# Altium PCB power-v3.2-exp.PcbDoc (part 2 of 2)
Units mil, origin at the board's own origin, x right, y up, seen from the top; angles counter-clockwise.
Board outline 6141.73 x 2047.24 mil, 4 copper layers (Top Layer, Layer 1, Layer 2, Bottom Layer), stack 60.469 mil thick; 175 components, 101 nets, 496 pads, 48 vias.
Unrouted connection lines stored in the file: 349.
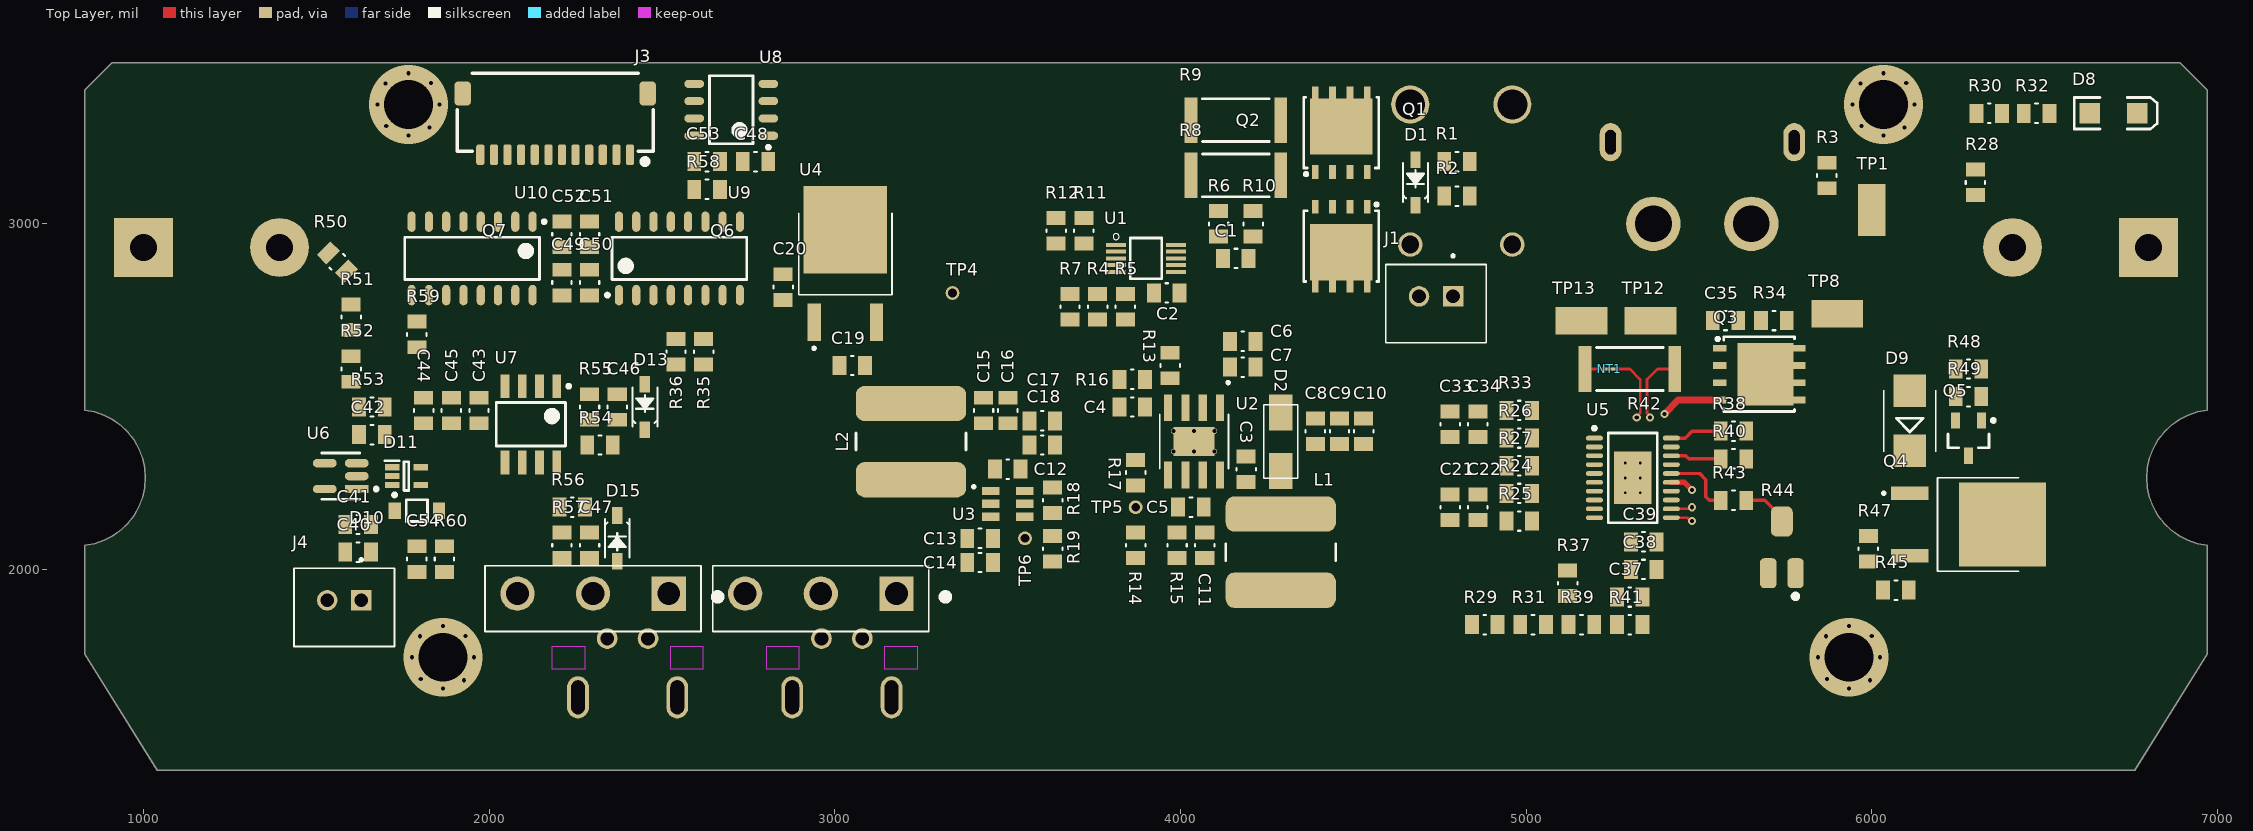
[diagram p0: Top Layer view]

## Free pads (board coordinates)
  round 78.74 hole 78.74: 1(5934.27,1745.85) 1(6034.27,3345.85)
  round 220.47 hole 141.73: ""(1765.73,3345.85) ""(1865.73,1745.85) ""(5934.27,1745.85) ""(6034.27,3345.85)

## Via types
v1: diameter 23.62, hole 11.81, Top Layer to Bottom Layer, 38 vias
v2: diameter 19.68, hole 7.87, Top Layer to Bottom Layer, 6 vias
v3: diameter 228.35, hole 141.73, Top Layer to Bottom Layer, 4 vias

## Nets (pads, with @x,y where several pads share a name; then routed paths per layer and width w, separated by ;. In a path a pad name is that pad's centre, name@x,y a point inside that pad or via, vN(x,y) a via of type N, cw(c..) or ccw(c..) an arc to the next point about the centre after c; other vN are vias at no path point)
3V3: C2.2 C20.1 C40.2 C41.1 C48.1 C49.1 C50.1 R4.1 R5.1 R7.1 R20.1 R35.2 R36.2 R59.2 U1.6 U4.2 U6.5 U8.1 U9.1 U10.16
5V: C15.1 C16.1 C17.1 C18.1 C19.1 J2.4 J2.8 L2.2 R18.1 R21.1 U4.3
5V_VFB: R18.2 R19.2 TP6.1 U3.4
12V: C8.1 C9.1 C10.1 C13.1 C14.1 C21.2 C22.2 C38.1 C39.1 C43.2 C44.1 C45.1 L1.2 R14.2 R22.1 R24.2 R25.2 U3.3 U3.5 U5.13 U5.14 U7.6
12V_EN: R13.2 R16.1 U2.3
12V_VSENSE: R14.1 R17.2 TP5.1 U2.5
+HV: C28.POS C29.POS C30.POS C31.POS C36.1 D7.2 D12.C D14.C P2.1 P3.1 R28.2 R29.2 R45.2 R46.2 R50.2
+VBAT: F1.3 F1.4 P1.2
A0_SEL: R12.1 U1.2
A1_SEL: R11.1 U1.1
CH_GND: R3.2
CHARGE: R37.2 TP9.1 U5.8 U10.14
CHARGE_OB: J3.10 U10.3
CHIP: U7.2 U10.13
CHIP_GATE: R54.2 R55.1 U7.7
CHIP_OB: J3.11 U10.4
DONE: R35.1 TP10.1 U5.7 U9.5
DONE_OB: J3.3 U9.12
FAULT: R36.1 TP11.1 U5.6 U9.4
FAULT_OB: J3.4 U9.13
FB: C37.1 R39.1 R41.2 U5.10
GND: C2.1 C4.1 C5.1 C6.2 C7.2 C8.2 C9.2 C10.2 C11.1 C13.2 C14.2 C15.2 C16.2 C17.2 C18.2 C19.2 C20.2 C21.1 C22.1 C23.1 C24.1 C25.1 C26.1 C27.1 C28.NEG C29.NEG C30.NEG C31.NEG C32.NEG C33.1 C34.1 C36.2 C37.2 C38.2 C39.2 C40.1 C41.2 C42.1 C43.1 C44.2 C45.2 C46.1 C47.1 C48.2 C49.2 C50.2 C54.2 D2.A D3.2 D4.2 D5.2 D6.2 D8.2 D9.A D10.2 D11.2 D13.A D15.A J1.2 J2.3 J2.6 J2.7 NT1.2 P1.1 Q4.3 Q5.S Q6.3 Q7.3 R3.1 R11.2 R12.2 R16.2 R17.1 R19.1 R37.1 R41.1 R42.1 R44.3 R49.1 R53.2 R55.2 R57.2 T1.12 TP1.1 TP13.1 U1.7 U2.7 U2.9 U2.V1 U2.V2 U2.V3 U2.V4 U2.V5 U2.V6 U3.1 U4.1 U5.9 U5.21 U6.2 U7.3 U8.4 U9.2 U9.8 U10.9 U10.15 | length 59.9
  Top Layer w8: R42.1 NT1.2
  other v2: 5287.13,2221.54 5330.43,2221.54 5287.13,2264.84 5330.43,2264.84 5287.13,2308.15 5330.43,2308.15
GND_CN: C51.2 C52.2 C53.2 J3.6 J3.9 U8.5 U9.9 U9.15 U10.2 U10.8
HV-SENSE: D10.1 D11.3 R60.2 TP17.1 U6.1 U6.4
HV_GATE: Q3.G U5.15 | length 528.1
  Top Layer w16: U5.15 5457.95,2252.05 v1(5480,2230)
  Top Layer w20: v1(5400,2450) 5440,2490 Q3.G
  Layer 2 w16: v1(5400,2450) 5400,2260 5430,2230 v1(5480,2230)
HV_SENSE_OB: C54.1 J4.1 R60.1
KICK: U7.4 U10.12
KICK_GATE: R56.2 R57.1 U7.5
KICK_OB: J3.12 U10.5
LT_CSN: NT1.1 U5.11 | length 689.6
  Top Layer w8: NT1.1 5300,2580 5330,2550 5330,2452.5 5320,2442.5 v1(5320,2440) ; U5.11 5466.09,2149.68 5475.77,2140 v1(5480,2140)
  Layer 2 w8: v1(5320,2440) 5360.89,2399.11 5360.89,2169 5373.32,2156.57 5460.93,2156.57 5477.5,2140 v1(5480,2140)
LT_CSP: Q3.S R42.2 TP12.1 U5.12 | length 654.4
  Top Layer w8: v1(5358.47,2439.82) 5358.47,2443.85 5350,2452.32 5350,2550 5380,2580 R42.2 ; U5.12 5475.28,2175.28 v1(5480,2180)
  Layer 2 w8: v1(5358.47,2439.82) 5358.47,2435.6 5372.95,2421.11 5372.95,2173.2 5377.64,2168.51 5467.5,2168.51 5478.99,2180 v1(5480,2180)
NetC1_1: C1.1 R10.1 U1.10
NetC1_2: C1.2 R6.1 U1.9
NetC3_1: C3.1 U2.1
NetC3_2: C3.2 D2.C L1.1 U2.8
NetC4_2: C4.2 U2.4
NetC5_2: C5.2 R15.1 U2.6
NetC11_2: C11.2 R15.2
NetC12_1: C12.1 U3.6
NetC12_2: C12.2 L2.1 U3.2
NetC35_1: C35.1 R34.1
NetC42_2: C42.2 D11.1 R52.1 R53.1 TP16.1 U6.3
NetC46_2: C46.2 D13.C Q6.1 R54.1
NetC47_2: C47.2 D15.C Q7.1 R56.1
NetD1_A: D1.A Q1.G Q2.G R1.1
NetD1_C: D1.C Q1.S Q2.S R2.1
NetD3_1: D3.1 R20.2
NetD4_1: D4.1 R21.2
NetD5_1: D5.1 R22.2
NetD6_1: D6.1 R23.2
NetD7_IN: D7.3 T1.1
NetD8_1: D8.1 R32.1
NetD9_C: D9.C Q4.1 Q5.D R47.1 TP14.1
NetD11_4: D11.4
NetD11_5: D11.5
NetD12_A: D12.A P2.2 Q6.2
NetD14_A: D14.A P3.2 Q7.2
NetF1_1: F1.1 F1.2 Q1.D
NetJ1_1: J1.1 R1.2 R2.2
NetJ4_2: J4.2
NetQ3_D: Q3.D R34.2 R38.1 R40.1 T1.7 T1.8 T1.9 T1.10 TP8.1
NetQ4_D: Q4.2 R46.1
NetQ5_G: Q5.G R48.1 R49.2 TP15.1
NetR28_1: R28.1 R30.2
NetR29_1: R29.1 R31.2
NetR30_1: R30.1 R32.2
NetR31_1: R31.1 R39.2
NetR43_1: R43.1 R44.2 | length 135.3
  Top Layer w8: R44.2 R44.2@5740,2144.65
  Top Layer w10: R43.1 5690.55,2200 5740,2150.55 R44.2@5740,2144.65
NetR44_1: R44.1
NetR45_1: R45.1 R47.2
NetR50_1: R50.1 R51.2
NetR51_1: R51.1 R52.2
NetR58_2: R58.2 U9.10
NetR59_1: R59.1 U10.10
NetU5_17: U5.17
NetU5_19: U5.19
NetU7_1: U7.1
NetU7_8: U7.8
NetU9_6: U9.6
NetU9_7: U9.7
NetU9_11: U9.11
NetU10_6: U10.6
NetU10_7: U10.7
NetU10_11: U10.11
OVLO1: R27.1 U5.3
OVLO2: R25.1 U5.5
PMS_ALERT: R7.2 TP4.1 U1.3 U9.3
PMS_ALERT_OB: J3.5 U9.14
PMS_SCL: R4.2 TP3.1 U1.5 U8.2
PMS_SCL_OB: J3.1 U8.7
PMS_SDA: R5.2 TP2.1 U1.4 U8.3
PMS_SDA_OB: J3.2 U8.6
RBG: R43.2 U5.16 | length 204.4
  Top Layer w10: U5.16 5502.36,2277.64 5520,2260 5520,2210 5530,2200 R43.2
RDCM: R38.2 U5.20 | length 151.3
  Top Layer w10: U5.20 5460,2380 5480,2400 R38.2
RVOUT: R40.2 U5.18 | length 146.7
  Top Layer w10: U5.18 5461.18,2328.82 5470,2320 R40.2
RVTRANS: R33.2 U5.1
UVLO1: R26.1 U5.2
UVLO2: R24.1 U5.4
VCC: C6.1 C7.1 C23.2 C24.2 C25.2 C26.2 C27.2 C32.POS C33.2 C34.2 C35.2 J2.1 J2.2 J2.5 R6.2 R8.1 R9.1 R13.1 R23.1 R26.2 R27.2 R33.1 R48.2 T1.3 T1.4 T1.5 T1.6 TP7.1 U1.8 U2.2
VCC_CN: C51.1 C52.1 C53.1 J3.7 J3.8 R58.1 U8.8 U9.16 U10.1
VCC_RPP: Q2.D R8.2 R9.2 R10.2
pads on no net: D7.1 J2.NC J3.NC P1.Un1 P1.Un2 P2.NC P3.NC R46.3 T1.2 T1.11
copper on no net:
  other v1: 1865.73,1655.85 5934.27,1655.85 1926.14,1679.24 5994.69,1679.24 1801.5,1682.72 5870.04,1682.72 1775.73,1745.85 1955.73,1745.85 5844.27,1745.85 6024.27,1745.85 1799.43,1806.53 1931.42,1807.17 5867.97,1806.53 5999.96,1807.17 1865.73,1835.85 5934.27,1835.85 1765.73,3255.85 6034.27,3255.85 1826.14,3279.24 6094.69,3279.24 1701.5,3282.72 5970.04,3282.72 1675.73,3345.85 1855.73,3345.85 5944.27,3345.85 6124.27,3345.85 1699.43,3406.53 1831.42,3407.17 5967.97,3406.53 6099.96,3407.17 1765.73,3435.85 6034.27,3435.85
  other v3: 1865.73,1745.85 5934.27,1745.85 1765.73,3345.85 6034.27,3345.85

## Silkscreen, mask and mechanical layers (free items; w line width, h text height)
Mechanical 16:
  lines w10: 2960.12,4400 4839.88,4400 4839.88,5728.58 2960.12,5728.58 2960.12,4400 ; 3386.38,3500 4400,3500 4400,4395.51 3386.38,4395.51 3386.38,3500
  text "BATTERY POSITION" at 3000,5600 h36
  text "GENEVA MOTOR  / POSITION" at 3500,4100 h36